# Altium PCB MTB.TEMPLATE.PcbDoc (part 2 of 3)
Units mm, origin at the board's own origin, x right, y up, seen from the top; angles counter-clockwise.
Board outline 100 x 100 mm, 2 copper layers (Top Layer, Bottom Layer), stack 1.576 mm thick; 279 components, 187 nets, 803 pads, 2 vias.
Unrouted connection lines stored in the file: 418.
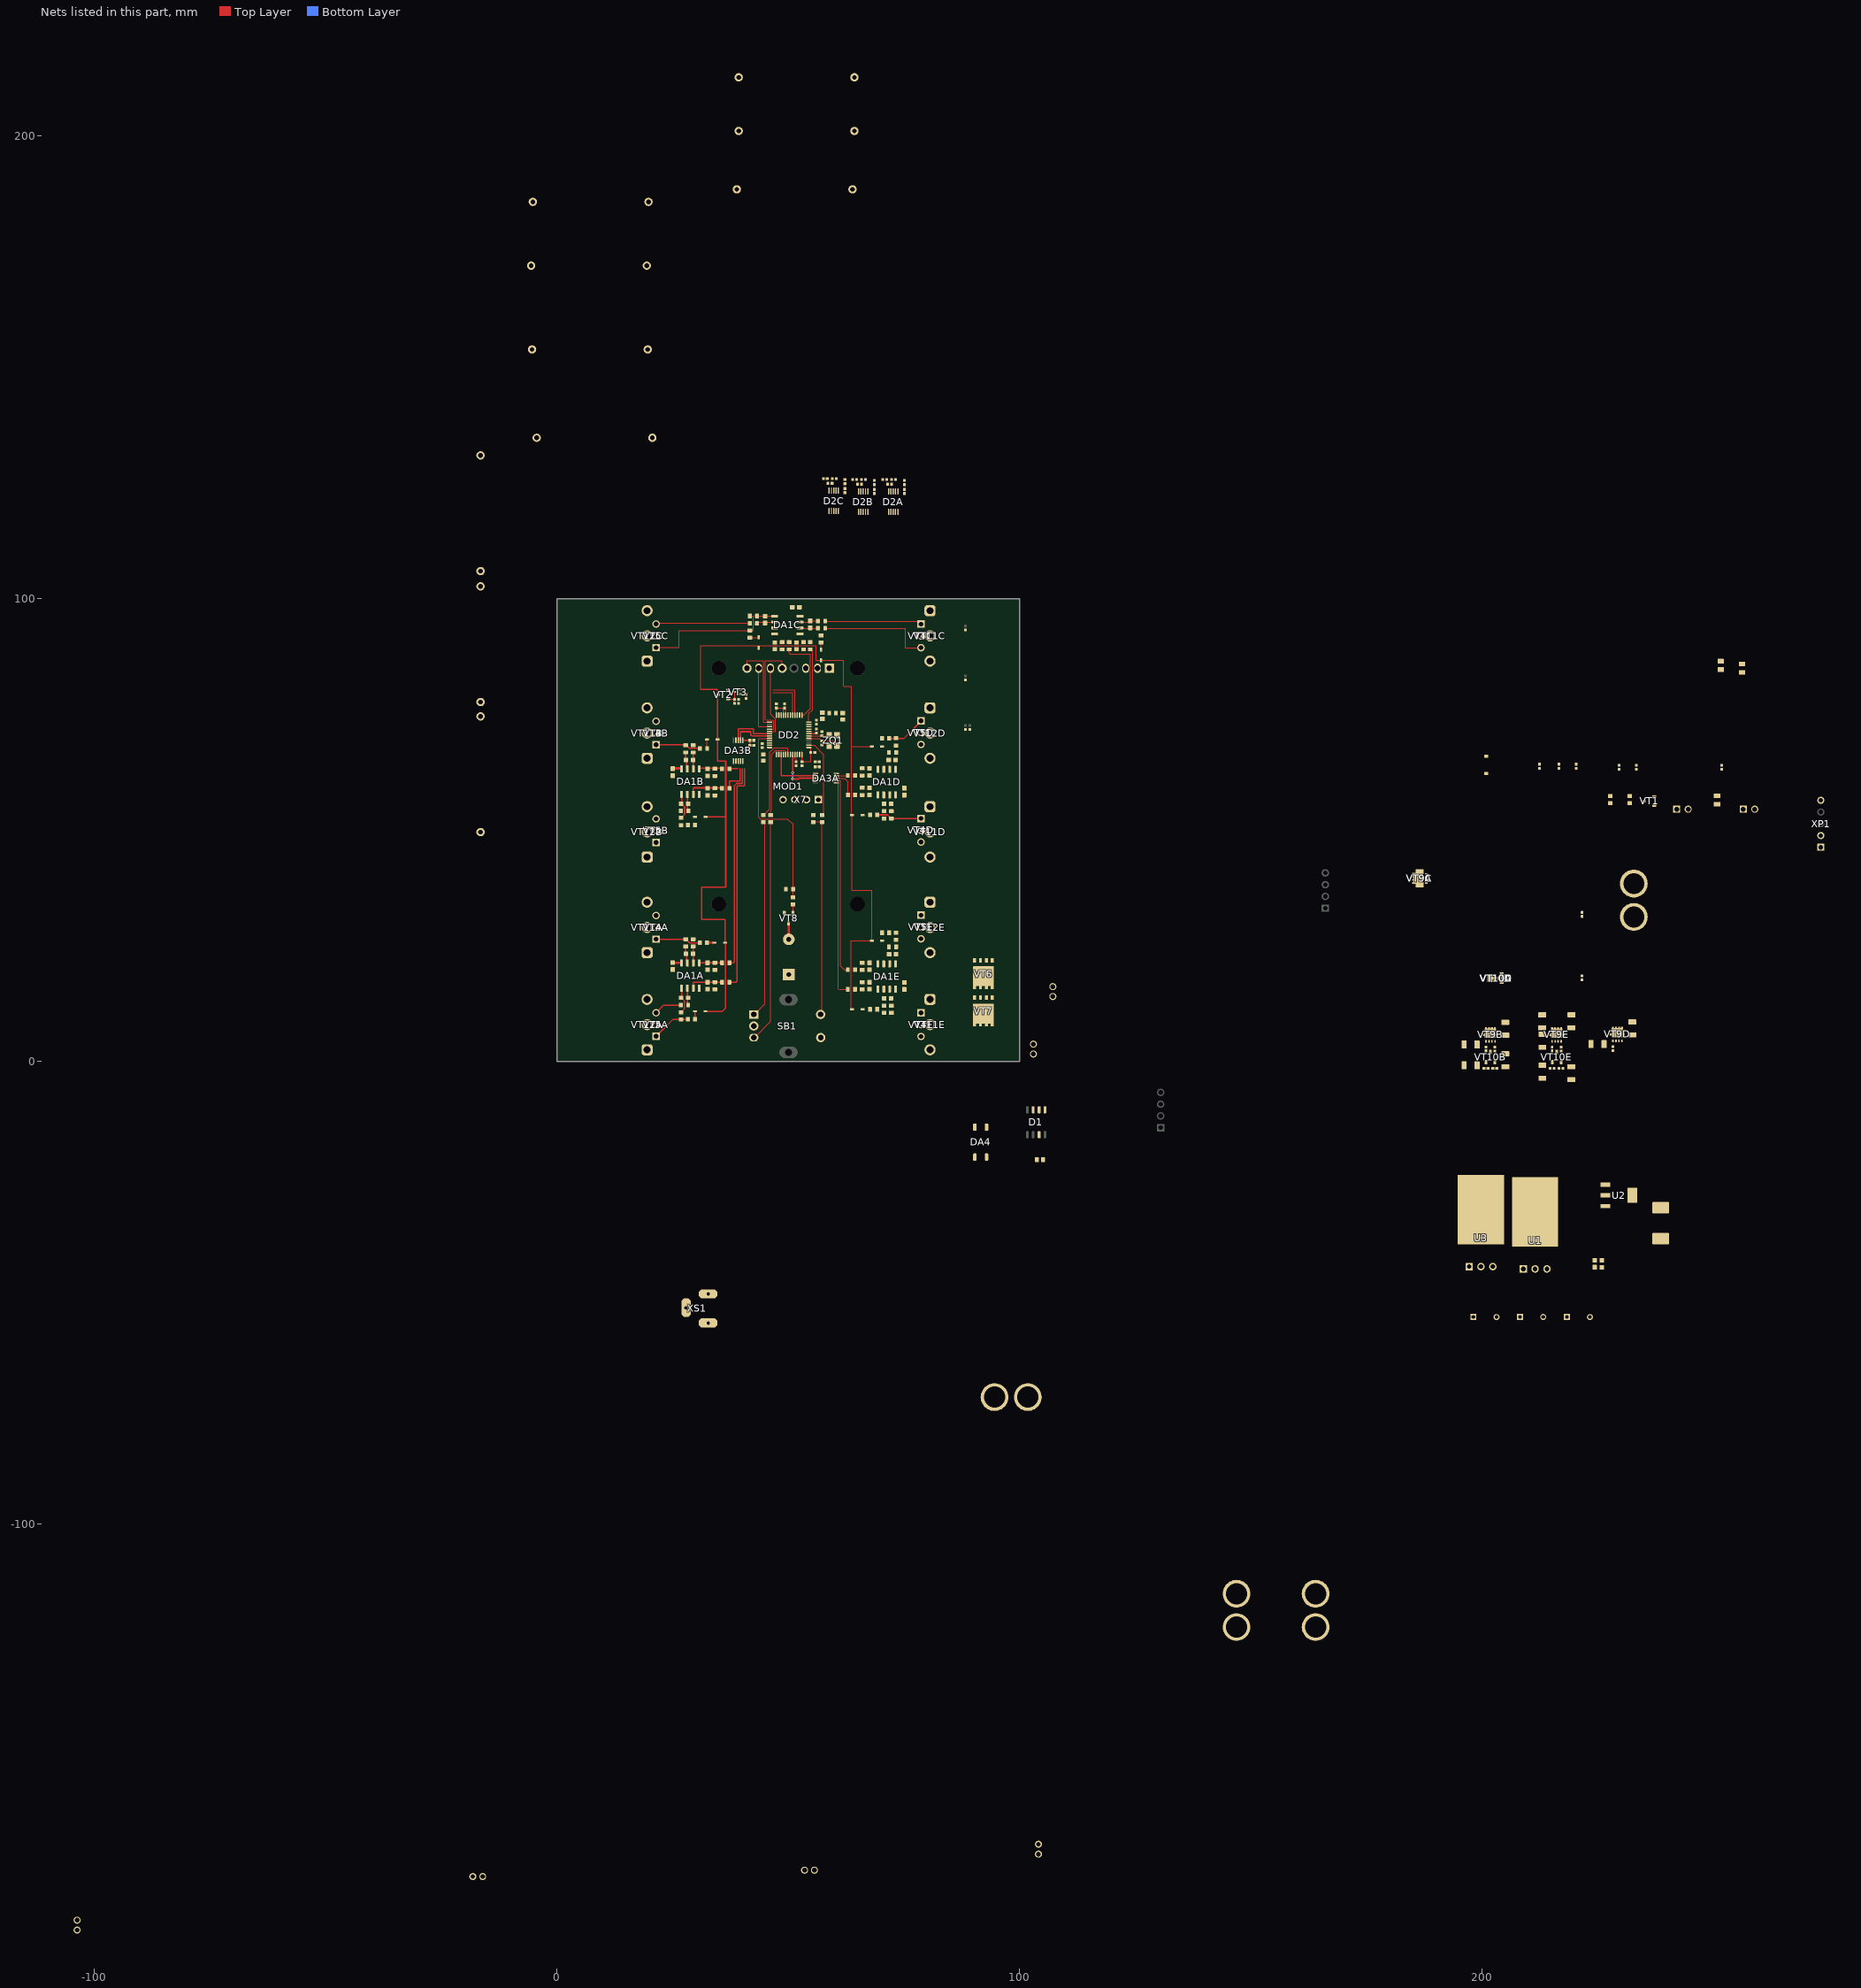
[diagram p2: the nets of this part, all layers, seen from the top]

## Part data
10kB 10kC 10kD 10kE: library part "10 k  R0402", "RES SMD 10 k OHM  ±1% 1/16W 0402", Operation Temperature="-55℃ to 155℃", Package/Case=0402, Power Rating=0.063W, Temperature Coefficient="±100 ppm/°C", Tolerance=±1%, Library Path 1=Resistor.SchLib, Name Component=Resistror, Part Number="10 k  R0402"
C1: library part "0.1µF  50V C0603", "CAP CER 0.1UF 50V X7R 0603", Manufacturer="Samsung Electro-Mechanics", Manufacturer P/N=CL10B104KB8WPNC, Operation Temperature="-55°C ~ 125°C", Package/Case=C0603, Power (V/A)=50V, Supplier Part Number 1=1276-6854-2-ND, Temperature Coefficient=X7R, Tolerance=±10%, ComponentLink1Description=Datasheet, ComponentLink1URL=https://www.samsungsem.com/resources/file/global/support/product_catalog/MLCC.pdf, Library Path 1=Capacitors.SchLib, Name Component="Capacitor Ceramic", Notes="06035C104K4T4A, 06035C104K4T2A", Part Number="0.1µF  50V C0603", Supplier 1=Digi-key
C2A C2B C2C C2D C2E C3A C3B C3C C3D C3E C4A C4B C4C C4D C4E C16A C16B C16C C16D C16E C17A C17B C17C C17D C17E C25 C26: library part "0.1uF  50V C0603", "CAP CER 0.1UF 50V X7R 0603", Manufacturer="Samsung Electro-Mechanics", Manufacturer P/N=CL10B104KB8WPNC, Operation Temperature="-55°C ~ 125°C", Package/Case=C0603, Power (V/A)=50V, Supplier Part Number 1=1276-6854-2-ND, Temperature Coefficient=X7R, Tolerance=±10%, ComponentLink1Description=Datasheet, ComponentLink1URL=https://www.samsungsem.com/resources/file/global/support/product_catalog/MLCC.pdf, Library Path 1=Capacitors.SchLib, Name Component="Capacitor Ceramic", Notes="06035C104K4T4A, 06035C104K4T2A", Part Number="0.1uF  50V C0603", Supplier 1=Digi-key
C5 C24 C32: library part "1000uF  16V 10x16(EHR)", "1000uF 20% 16V EHR 10x16mm", Manufacturer=Hitano, Manufacturer P/N=EHR102M16BA, Operation Temperature="−40°C to +105°C", Package/Case=10x16(EHR), Power (V/A)=16V, Tolerance=±20%, ComponentLink1Description=Datasheet, ComponentLink1URL=https://www.rcscomponents.kiev.ua/datasheets/EHR_081225.pdf, Library Path 1=Capacitors.SchLib, Name Component="Electrolytic capacitor", Part Number="1000uF  16V 10x16(EHR)", Supplier 1=RCS
C6 C9: library part "10µF  6.3V C0603", "CAP CER 10UF 6.3V X5R 0603", Manufacturer="Murata Electronics North America", Manufacturer P/N=GRM185R60J106ME15D, Operation Temperature="-55°C ~ 105°C", Package/Case=C0603, Power (V/A)=6.3V, Supplier Part Number 1=490-10467-2-ND, Temperature Coefficient=X5R, Tolerance=±20%, ComponentLink1Description=Datasheet, ComponentLink1URL=https://www.murata.com/~/media/webrenewal/support/library/catalog/products/capacitor/mlcc/c02e.ashx?la=en-us, Library Path 1=Capacitors.SchLib, Name Component="Capacitor Ceramic", Notes=GRM185R60J106ME15J, Part Number="10µF  6.3V C0603", Supplier 1=Digi-key
C7 C8 C10 C11 C12 C13 C15 C18: library part GRM155R71E104KE14J, "100nF 25V X7R ±10% 0402 Ceramic Capacitor RoHS", Dielectric Type=X7R, Manufacturer="Murata Electronics", Package=0402, Temperature range="-55°C ~ 125°C", Tolerance=±10%, Voltage=25V, Ajax_1C_ID=24481, Ajax_1C_PN="100nF 25V X7R 10% 0402 GRM155R71E104KE14J Ceramic Capacitor SMD RoHS", Ajax_1С_Status="Mass Production", Component Status=Released, Component Type=SMD, ComponentLink1Description=Datasheet, ComponentLink1URL=https://eu.mouser.com/datasheet/2/281/1/GRM155R71E104KE14_01A-1984358.pdf, GUID_1C=92ffc16c-33b6-11eb-ab6e-0050569f2651, Part Number=GRM155R71E104KE14J, Part Type="Ceramic / X7R / 0402", Price=0.00630066, Replacement=NONE, Standard Lead Time="24 Weeks"
C14: library part "1µF  25V C0603", "CAP CER 1UF 25V X5R 0603", Manufacturer="AVX Corporation", Manufacturer P/N=06033D105KAT2A, Operation Temperature="-55°C ~ 105°C", Package/Case=C0603, Power (V/A)=25V, Supplier Part Number 1=478-5142-2-ND, Temperature Coefficient=X5R, Tolerance=±10%, ComponentLink1Description=Datasheet, ComponentLink1URL=http://catalogs.avx.com/SurfaceMount.pdf, Library Path 1=Capacitors.SchLib, Name Component="Capacitor Ceramic", Part Number="1µF  25V C0603", Supplier 1=Digi-key
C20A C20B: library part CL05A105KP5NNNC, "1uF 10V Х5R ±10% 0402 Ceramic Capacitor RoHS", Dielectric Type=X5R, Manufacturer="Samsung Electro-Mechanics", Package=0402, Supplier Part Number 1=1276-1076-2-ND, Temperature range="-55°C ~ 85°C", Tolerance=±10%, Voltage=10V, Ajax_1C_ID=23659, Ajax_1C_PN="1uF 10V Х5R 10% 0402 Samsung CL05A105KP5NNNC Ceramic Capacitor SMD RoHS", Ajax_1С_Status="Mass Production", Component Status=Released, Component Type=SMD, ComponentLink1Description=Datasheet, ComponentLink1URL=https://media.digikey.com/pdf/Data%20Sheets/Samsung%20PDFs/CL_Series_MLCC_ds.pdf, GUID_1C=556ec478-1f42-11eb-ab6d-0050569f2651, Part Number=CL05A105KP5NNNC, Part Type="Ceramic / X5R / 0402", Price=0.00141, Replacement=NONE, Standard Lead Time="18 Weeks", Supplier 1=Digi-Key
C21A C21B: library part CL05A104KA5NNNC, "100nF 25V X5R ±10% 0402 Ceramic Capacitor RoHS", Dielectric Type=X5R, Manufacturer="Samsung Electro-Mechanics", Package=0402, Supplier Part Number 1=187-CL05A104KA5NNNC, Temperature range="-55°C ~ 85°C", Tolerance=±10%, Voltage=25V, Ajax_1C_ID=27170, Ajax_1C_PN="100nF 25V X5R 10% 0402 CL05A104KA5NNNC Ceramic Capacitor SMD RoHS", Ajax_1С_Status="Mass Production", Component Status=Released, Component Type=SMD, ComponentLink1Description=Datasheet, ComponentLink1URL=https://eu.mouser.com/datasheet/2/585/MLCC-1837944.pdf, GUID_1C=6c9121f0-7733-11eb-ab70-0050569f2651, Part Number=CL05A104KA5NNNC, Part Type="Ceramic / X5R / 0402", Price=0.0013, Replacement=NONE, Standard Lead Time="38 Weeks", Supplier 1=Mouser
C22 C28: library part CAP0805, "0805 CAP 100nF 50V"
C27: library part "220uF  10V CASE-D", "CAP TANT 220UF 20% 10V 2917", Manufacturer=KEMET, Manufacturer P/N=T491D227M010AT, Operation Temperature="-55°C ~ 125°C", Package/Case=CASE-D, Power (V/A)=10V, Supplier Part Number 1=399-9744-2-ND, Temperature Coefficient=-, Tolerance=±20%, ComponentLink1Description=Datasheet, ComponentLink1URL=https://content.kemet.com/datasheets/KEM_T2005_T491.pdf, Library Path 1=Capacitors.SchLib, Name Component=CapacitorTantalum, Part Number="220uF  10V CASE-D", Supplier 1=Digi-key
C29 C30: library part CL05C120JB5NNNC, "12pF 50V C0G ±5% 0402 Ceramic Capacitor RoHS", Dielectric Type=C0G/NP0, Manufacturer="Samsung Electro-Mechanics", Package=0402, Supplier Part Number 1=1276-1178-2-ND, Temperature range="-55°C ~ 125°C", Tolerance=±5%, Voltage=50V, Ajax_1C_ID=15982, Ajax_1C_PN="12pF 50V COG 5% 0402 CL05C120JB5NNNC Ceramic Capacitor SMD RoHS", Ajax_1С_Status="Mass Production", Component Status=Released, Component Type=SMD, ComponentLink1Description=Datasheet, ComponentLink1URL=https://media.digikey.com/pdf/Data%20Sheets/Samsung%20PDFs/CL_Series_MLCC_ds.pdf, GUID_1C=5e79e13c-76f0-11e9-ab56-0050569f2651, Part Number=CL05C120JB5NNNC, Part Type="Ceramic / C0G(NP0) / 0402", Price=0.0022, Replacement=NONE, Standard Lead Time="28 Weeks", Supplier 1=Digi-Key
C31A C31B C31C: library part "10uF  6.3V C0402", "CAP CER 10UF 6.3V X6S 0402", Manufacturer="Murata Electronics North America", Manufacturer P/N=GRM155C80J106ME11D, Operation Temperature="-55°C ~ 105°C", Package/Case=C0402, Power (V/A)=6.3V, Supplier Part Number 1=490-13233-2-ND, Temperature Coefficient=X6S, Tolerance=±20%, ComponentLink1Description=Datasheet, ComponentLink1URL=https://www.murata.com/~/media/webrenewal/support/library/catalog/products/capacitor/mlcc/c02e.ashx?la=en-us, Library Path 1=Capacitors.SchLib, Name Component="Capacitor Ceramic", Part Number="10uF  6.3V C0402", Supplier 1=Digi-key
C33A C33B C33C: library part "0.1uF  25V C0403", "CAP CER 0.1UF 25V X7R 0603", Manufacturer="Samsung Electro-Mechanics", Operation Temperature="-55°C ~ 125°C", Package/Case=C0403, Power (V/A)=25V, Supplier Part Number 1=1276-6854-2-ND, Temperature Coefficient=X7R, Tolerance=±10%, ComponentLink1Description=Datasheet, Library Path 1=Capacitors.SchLib, Name Component="Capacitor Ceramic", Part Number="0.1uF  25V C0403"
C34A C34B C34C: library part "10nF  50V C0402", "CAP CER 10NF 50V NP0 0603", Manufacturer="AVX Corporation", Operation Temperature="-55°C ~ 105°C", Package/Case=C0402, Power (V/A)=50V, Temperature Coefficient="C0G, NP0", Tolerance=±0.25pF, ComponentLink1Description=Datasheet, Library Path 1=Capacitors.SchLib, Name Component="Capacitor Ceramic", Part Number="10nF  50V C0402", Supplier 1=Digi-key
D1: "3.3V Half Duplex CAN Transceivers with CAN FD, 5 Mbps, SOIC-8", Manufacturer="Texas Instruments", Package=SOIC-8, Supplier Part Number 1=595-TCAN332GD, Temperature range="-40°C ~ 125°C", Ajax_1C_PN=NONE, Ajax_1С_Status="RND Only", Component Status=Released, Component Type=SMD, ComponentLink1Description=Datasheet, ComponentLink1URL=https://www.ti.com/lit/ds/symlink/tcan334g.pdf, Lifecycle="Packaging Not for Production", Part Number=TCAN332GD, Part Type="Transceivers / CAN", Price=NONE, Replacement=NONE, Standard Lead Time="56 Weeks", Supplier 1=Mouser
D2A D2B D2C: "85V, 20Bit, Ultra-Precise Power/Energy/Charge Monitor With I2C, 2.7V to 5.5V Supply, VSSOP-10", Manufacturer="Texas Instruments", Package=VSSOP-10, Supplier Part Number 1=296-INA228AIDGSRTR-ND, Temperature range="-40°C ~ 125°C", Ajax_1C_ID=73549, Ajax_1C_PN="INA228AIDGSR IC Power Supply Controller VSSOP-10 TI", Ajax_1С_Status="Mass Production", Component Status=Released, Component Type=SMD, ComponentLink1Description=Datasheet, ComponentLink1URL=https://www.ti.com/lit/ds/symlink/ina228.pdf, GUID_1C=d5df315a-0f3b-11ee-a36c-005056994834, Part Number=INA228AIDGSR, Part Type="Amplifier / Current Sense", Price=3.28, Replacement=NONE, Standard Lead Time="57 Weeks", Supplier 1=Digi-Key
DA1A DA1B DA1C DA1D DA1E: "IC OPAMP GP 2 CIRCUIT 8SOIC  1.1 MHz   3V...30V", Manufacturer="Texas Instruments", Manufacturer P/N=LM358ADR, Operation Temperature="0°C ~ 70°C", Package/Case=8-SOIC, Power (V/A)="3V ~ 30V", ComponentLink1Description=Datasheet, ComponentLink1URL=https://www.st.com/content/ccc/resource/technical/document/datasheet/61/46/87/01/98/ed/44/c5/CD00000464.pdf/files/CD00000464.pdf/jcr:content/translations/en.CD00000464.pdf, Library Path 1="Integrated Circuit.SchLib", Name Component=Comparators, Part Number=LM358ADT, Supplier 1=Kosmodrom, Supplier Part Number 1=LM358ADT
DA3A DA3B: "12-Bit, Quad Digital-to-Analog Converter with EEPROM Memory, MSOP-10", Manufacturer="Microchip Technology", Package=MSOP-10, Supplier Part Number 1=MCP4728A0T-E/UNTR-ND, Temperature range="-40°C ~ 125°C", Ajax_1C_ID=39734, Ajax_1C_PN="MCP4728A0T-E/UN MSOP-10 мікросхема", Ajax_1С_Status="Mass Production", Component Status=Released, Component Type=SMD, ComponentLink1Description=Datasheet, ComponentLink1URL=https://ww1.microchip.com/downloads/en/DeviceDoc/22187E.pdf, GUID_1C=ce0ad344-8e40-11ec-a90d-00505699469b, Part Number=MCP4728A0T-E/UN, Part Type=DAC, Price=2.09, Replacement=NONE, Standard Lead Time="52 Weeks", Supplier 1=Digi-Key
DA4: "Photovoltaic MOSFET Driver with Integrated Fast Turn-Off, 3750 VRMS", Color=NONE, Manufacturer="Vishay Semiconductors", Package=SOP-4, Supplier Part Number 1=VOM1271TTR-ND, Temperature range="-40°C ~ 100°C", Ajax_1C_ID=15545, Ajax_1C_PN="VOM1271T оптрон", Ajax_1С_Status="Mass Production", Component Status=Released, Component Type=SMD, ComponentLink1Description=Datasheet, ComponentLink1URL=https://www.vishay.com/docs/83469/vom1271.pdf, GUID_1C=d92e23f6-5530-11e9-ab4e-0050569f2651, Part Number=VOM1271T, Part Type=Optocoupler, Price=1.2896, Replacement=NONE, Supplier 1=Digi-Key, Wavelength=NONE
DD2: "ARM® Cortex®-M4F STM32G4 Microcontroller IC 32-Bit Single-Core 170MHz 128KB (128K x 8) FLASH 48-LQFP (7x7)", Manufacturer=STMicroelectronics, Operation Temperature="-40°C ~ 85°C (TA)", Package="UFQFPN-48 STMicroelectronics", Package/Case=48-LQFP, Power (V/A)="1.71V ~ 3.6V", Supplier Part Number 1=497-19475-ND, Check_prices=https://www.snapeda.com/parts/STM32G431CBU6/STMicroelectronics/view-part/?ref=eda, ComponentLink1Description=Datasheet, ComponentLink1URL=https://www.st.com/resource/en/datasheet/stm32g431cb.pdf, Library Path 1="Integrated Circuit.SchLib", Manufacturer P/N=STM32G431CBT6, MF=STMicroelectronics, MP=STM32G431CBU6, Name Component=Microcontrollers, Part Number=STM32G431CBT6, SnapEDA_Link=https://www.snapeda.com/parts/STM32G431CBU6/STMicroelectronics/view-part/?ref=snap, Supplier 1=Digi-key
HA1: "AUDIO MAGNETIC 1.2-2.5 V", Operation Temperature="-20 °C to +70 °C", Package/Case=12x9.5, Power (V/A)="1,2...2,5 V", AbridgedComponentDescription=TMB12A01, ComponentDescription="Buzzer  TMB12A01  (12x9.5)", ComponentLink1Description=Datasheet, ComponentLink1URL=http://www.kosmodrom.com.ua/el.php?name=TMB12A01, Library Path 1=Others.SchLib, Name Component=Buzzer, Part Number=TMB12A01, Supplier 1=Kosmodrom, Supplier Part Number 1=TMB12A01
L2: "FERRITE BEAD 1 KOHM 0603 1LN", Manufacturer="Murata Electronics North America", Manufacturer P/N=BLM18AG102SZ1D, Package/Case="0603 (1608 Metric)", Power (V/A)=400mA, Supplier Part Number 1=490-16503-2-ND, Tolerance=±25%, ComponentLink1Description=Datasheet, ComponentLink1URL=https://media.digikey.com/pdf/Data%20Sheets/Murata%20PDFs/BLM18yyyyyyN1x.pdf, Library Path 1=Inductance.SchLib, Name Component="Ferrite Beads", Part Number=BLM18AG102, Supplier 1=Digi-key
MOD1: "Display Board TFT 1.8\" SPI Driver ST7735S with SD", Operation Temperature="-40°C ~ 85°C", Package/Case=56x35mm, Power (V/A)="3.3 V", ComponentLink1Description=Datasheet, Library Path 1=Module.SchLib, Name Component=Display, Part Number="TFT 1.8\" SPI Board"
R1: library part RC0805FR-0730KL, "30 kOhms ±1%, 1/8W 0805 Thick Film Resistor", Manufacturer=Yageo, Package=0805, Power Rating=0.125W, Supplier Part Number 1=311-30.0KCRTR-ND, Temperature range="-55°C ~ 155°C", Temperature Stability=±100ppm/°C, Tolerance=±1%, Voltage=150V, Ajax_1C_ID=9642, Ajax_1C_PN="30k 1% 0805 Resistors SMD RoHS", Ajax_1С_Status="Mass Production", Component Status=Released, Component Type=SMD, ComponentLink1Description=Datasheet, ComponentLink1URL=https://eu.mouser.com/datasheet/2/447/PYu_RC_Group_51_RoHS_L_10-1664068.pdf, GUID_1C=71e2aa09-07e0-11e7-82d0-d8cb8a9acc66, Part Number=RC0805FR-0730KL, Part Type="Thick Film", Price=0.0014, Replacement=NONE, Supplier 1=Digi-Key
R2: library part RC0805FR-07100KL, "100 kOhms ±1%, 1/8W 0805 Thick Film Resistor", Manufacturer=Yageo, Package=0805, Power Rating=0.125W, Supplier Part Number 1=311-100KCRTR-ND, Temperature range="-55°C ~ 155°C", Temperature Stability=±100ppm/°C, Tolerance=±1%, Voltage=150V, Ajax_1C_ID=7487, Ajax_1C_PN="100k 1% 0805 Resistors SMD RoHS", Ajax_1С_Status="Mass Production", Component Status=Released, Component Type=SMD, ComponentLink1Description=Datasheet, ComponentLink1URL=https://eu.mouser.com/datasheet/2/447/PYu_RC_Group_51_RoHS_L_10-1664068.pdf, GUID_1C=0fb4516d-b2dc-11e5-8119-d8cb8a9acc66, Part Number=RC0805FR-07100KL, Part Type="Thick Film", Price=0.0014, Replacement=NONE, Supplier 1=Digi-Key
R3 R10 R11 R28: library part RC0402FR-07220RL, "220 Ohms ±1% 1/16W 0402 Thick Film Resistor", Manufacturer=Yageo, Package=0402, Power Rating=0.062W, Temperature range="-55°C ~ 155°C", Temperature Stability=±100ppm/°C, Tolerance=±1%, Voltage=50V, Ajax_1C_ID=6466, Ajax_1C_PN="220R 1% 0402 Resistors SMD RoHS", Ajax_1С_Status="Mass Production", Component Status=Released, Component Type=SMD, ComponentLink1Description=Datasheet, ComponentLink1URL=https://eu.mouser.com/datasheet/2/447/PYu_RC_Group_51_RoHS_L_10-1664068.pdf, GUID_1C=c8eea36b-fd66-11e4-ad28-a45d36c4a9e5, Part Number=RC0402FR-07220RL, Part Type="Thick Film", Replacement=NONE
  R3 R10 R11: Price=0.00065
  R28: Price=0.0007
R4: library part "10 k  R0603", "RES SMD 10 k OHM  ±1% 1/10W 0603", Operation Temperature="-55℃ to 155℃", Power Rating=0.1W, Temperature Coefficient="±100 ppm/°C", Library Path 1=Resistor.SchLib, Name Component=Resistror, Part Number="10 k  R0603"
R5: library part RC0402FR-071KL, "1 kOhms ±1% 1/16W 0402 Thick Film Resistor", Manufacturer=Yageo, Package=0402, Power Rating=0.062W, Supplier Part Number 1=311-1.00KLRTR-ND, Temperature range="-55°C ~ 155°C", Temperature Stability=±100ppm/°C, Tolerance=±1%, Voltage=50V, Ajax_1C_ID=4845, Ajax_1C_PN="1k 1% 0402 Resistors SMD RoHS", Ajax_1С_Status="Mass Production", Component Status=Released, Component Type=SMD, ComponentLink1Description=Datasheet, ComponentLink1URL=https://eu.mouser.com/datasheet/2/447/PYu_RC_Group_51_RoHS_L_11-1984063.pdf, GUID_1C=bf05aaa5-08f0-11e4-b679-a45d36c4a9e5, Part Number=RC0402FR-071KL, Part Type="Thick Film", Price=0.0007, Replacement=NONE, Supplier 1=Digi-Key
R6 R32: library part "100  R0603", "RES SMD 100 OHM  ±1% 1/10W 0603", Operation Temperature="-55℃ to 155℃", Package/Case=0603, Power Rating=0.1W, Temperature Coefficient="±100 ppm/°C", Tolerance=±1%, Library Path 1=Resistor.SchLib, Name Component=Resistror, Part Number="100  R0603"
R7 R33: library part "100 k  R0603", "RES SMD 100 k OHM  ±1% 1/10W 0603", Operation Temperature="-55℃ to 155℃", Package/Case=0603, Power Rating=0.1W, Temperature Coefficient="±100 ppm/°C", Tolerance=±1%, Library Path 1=Resistor.SchLib, Name Component=Resistror, Part Number="100 k  R0603"
R9 R43 R45: library part "100  R0603", "RES SMD 100 OHM  ±1% 1/10W 0603", Operation Temperature="-55℃ to 155℃", Temperature Coefficient="±100 ppm/°C", Tolerance=±1%, Library Path 1=Resistor.SchLib, Name Component=Resistror, Part Number="100  R0603"
R12A R12B R12C R12D R12E R13A R13B R13C R13D R13E R14A R14B R14C R14D R14E R15A R15B R15C R15D R15E R16A R16B R16C R16D R16E R19A R19B R19C R19D R19E R20A R20B R20C R20D R20E R21A R21B R21C R21D R21E R22A R22B R22C R22D R22E R24A R24B R24C R24D R24E: library part "1 k  R0603", "RES SMD 1 k OHM  ±1% 1/10W 0603", Operation Temperature="-55℃ to 155℃", Package/Case=0603, Power Rating=0.1W, Temperature Coefficient="±100 ppm/°C", Tolerance=±1%, Library Path 1=Resistor.SchLib, Name Component=Resistror, Part Number="1 k  R0603"
R17A R17B R17C R17D R17E R26A R26B R26C R26D R26E: library part "47  RES_5W", "Resistror 47 OHM  ±10% AXIAL  9.00mm x 22.00mm", Operation Temperature="-55℃ to 155℃", Power Rating=5W, Temperature Coefficient="±100 ppm/°C", Tolerance=±10%, Library Path 1=Resistor.SchLib, Name Component=Resistror, Part Number="47  RES_5W"
R29 R46A R46B R46C R46D R46E: library part RC0402DR-071KL, "1 kOhms ±0.5% 1/16W 0402 Thick Film Resistor", Manufacturer=Yageo, Package=0402, Power Rating=0.062W, Supplier Part Number 1=13-RC0402DR-071KLTR-ND, Temperature range="-55°C ~ 155°C", Temperature Stability=±100ppm/°C, Tolerance=±0.5%, Voltage=50V, Ajax_1C_ID=54619, Ajax_1C_PN="1k 0.5% 0402 RC0402DR-071KL Resistors SMD RoHS", Ajax_1С_Status="Mass Production", Component Status=Released, Component Type=SMD, ComponentLink1Description=Datasheet, ComponentLink1URL=https://www.yageo.com/upload/media/product/productsearch/datasheet/rchip/PYu-RC_Group_51_RoHS_L_12.pdf, GUID_1C=a470e21a-6423-11ed-a366-005056994834, Part Number=RC0402DR-071KL, Part Type="Thick Film", Price=0.015, Replacement=NONE, Supplier 1=Digi-Key
R30: library part RC0402JR-0710KL, "10 kOhms ±5% 1/16W 0402 Thick Film Resistor", Manufacturer=Yageo, Package=0402, Power Rating=0.062W, Supplier Part Number 1=311-10KJRTR-ND, Temperature range="-55°C ~ 155°C", Temperature Stability=±100ppm/°C, Tolerance=±5%, Voltage=50V, Ajax_1C_ID=3447, Ajax_1C_PN="10k 5% 0402 Resistors SMD RoHS", Ajax_1С_Status="Mass Production", Component Status=Released, Component Type=SMD, ComponentLink1Description=Datasheet, ComponentLink1URL=https://eu.mouser.com/datasheet/2/447/PYu_RC_Group_51_RoHS_L_10-1664068.pdf, GUID_1C=0d073320-42e0-11e3-bb71-6c626deda1bb, Part Number=RC0402JR-0710KL, Part Type="Thick Film", Price=0.0005, Replacement=NONE, Supplier 1=Digi-Key
R31: library part "22  R0603", "RES SMD 22 OHM  ±1% 1/10W 0603", Operation Temperature="-55℃ to 155℃", Package/Case=0603, Temperature Coefficient="±100 ppm/°C", Tolerance=±1%, Library Path 1=Resistor.SchLib, Name Component=Resistror, Part Number="22  R0603"
R37A R37B R37C R38A R38B R38C: library part "10  R0402", "RES SMD 10 OHM  ±1% 1/16W 0402", Operation Temperature="-55℃ to 155℃", Package/Case=0402, Power Rating=0.063W, Temperature Coefficient="±200 ppm/°C", Tolerance=±1%, Library Path 1=Resistor.SchLib, Name Component=Resistror, Part Number="10  R0402"
R39A R39B R39C R39D R39E R40A R40B R40C R40D R40E R41A R41B R41C R41D R41E R47A R47B R47C R47D R47E R49A R49B R49C R49D R49E: library part RCS12060000Z0EA, "0 Ohms Jumper, 1/2W 1206 Thick Film Resistor", Manufacturer=Vishay, Package=1206, Power Rating=0.5W, Supplier Part Number 1=71-RCS12060000Z0EA, Temperature range="-55°C ~ 155°C", Temperature Stability=NONE, Tolerance=0.5%, Ajax_1C_ID=28766, Ajax_1C_PN="0R Jumper 1206 1/2W Resistors SMD RoHS", Ajax_1С_Status="Mass Production", Component Status=Released, Component Type=SMD, ComponentLink1Description=Datasheet, ComponentLink1URL=https://eu.mouser.com/datasheet/2/427/rcse3-1761771.pdf, GUID_1C=39e965f6-9d2d-11eb-ab70-0050569f2651, Part Number=RCS12060000Z0EA, Part Type="Thick Film", Price=0.023, Replacement=NONE, Supplier 1=Mouser, Voltage=NONE
R42A R42B R42C R42D R42E R48A R48B R48C R48D R48E: library part WF04U1003BTL, "100 kOhms ±0.1%, 1/16W 0402 Thin Film Resistor", Manufacturer="Walsin Technology Corporation", Package=0402, Power Rating=0.062W, Supplier Part Number 1=1292-WF04U1003BTLTR-ND, Temperature range="-55°C ~ 155°C", Temperature Stability=±25ppm/°C, Tolerance=±0.1%, Voltage=50V, Ajax_1C_ID=137562, Ajax_1C_PN="100k 0.1% 0402 62.5mW WF04U1003BTL Walsin Thin Film Resistors SMD RoHS", Ajax_1С_Status=Substitution, Component Status=Review, Component Type=SMD, ComponentLink1Description=Datasheet, ComponentLink1URL=https://www.passivecomponent.com/wp-content/uploads/thin_film/ASC_WFxxT&U.pdf, GUID_1C=d33922d2-2bd8-11f0-b984-00505699fadc, Part Number=WF04U1003BTL, Part Type="Thin Film", Price=0.109, Replacement=NONE, Supplier 1=Digi-Key
R44A R44B R44C R44D R44E: library part RC0402JR-07100RL, "100 Ohms ±5% 1/16W 0402 Thick Film Resistor", Manufacturer=Yageo, Package=0402, Power Rating=0.062W, Supplier Part Number 1=311-100JRTR-ND, Temperature range="-55°C ~ 155°C", Temperature Stability=±100ppm/°C, Tolerance=±5%, Voltage=50V, Ajax_1C_ID=4879, Ajax_1C_PN="100R 5% 0402 Resistors SMD RoHS", Ajax_1С_Status="Mass Production", Component Status=Released, Component Type=SMD, ComponentLink1Description=Datasheet, ComponentLink1URL=https://eu.mouser.com/datasheet/2/447/PYu_RC_Group_51_RoHS_L_10-1664068.pdf, GUID_1C=955d0a6e-1239-11e4-b679-a45d36c4a9e5, Part Number=RC0402JR-07100RL, Part Type="Thick Film", Price=0.00250459, Replacement=NONE, Supplier 1=Digi-Key
RK1A RK1B RK1C RK1D RK1E RK1F: "10 kOhm ±1% Thermistors, Radial Leaded, 3435 K B Parameter, 28.5x3.6mm, Max 0.6mm Thickness", Manufacturer="Dongguan Tianrui Electronics Co", Temperature range="-40°C ~ 105°C", Ajax_1C_ID=44964, Ajax_1C_PN="MF55-103F-3435 thermistor probe 10k ±1% 3.6*28.5mm Tianrui", Ajax_1С_Status="Mass Production", Component Status=Released, Component Type=PTH, ComponentLink1Description=Datasheet, ComponentLink1URL=\\altiumdb.ajax.local\files\Datasheet\Miscellaneous\MF55-103F-3435.pdf, GUID_1C=bce193fe-f38d-11ec-a361-005056994834, Part Number=MF55-103F-3435, Part Type=Thermistor, Price=0.13, Replacement=NONE
SB1: "Alps Alpine", Manufacturer P/N=EC11E15244B2, Operation Temperature="-20°C ~ 70°C", Power (V/A)="5V 10mA", AbridgedComponentDescription=EC11-PH-15, ComponentLink1Description=Datasheet, ComponentLink1URL=https://tech.alpsalpine.com/e/products/detail/EC11E15244B2/, Library Path 1=Switches.SchLib, Name Component=Encoder, Part Number=EC11-PH-15, Supplier 1=Digi-key
U1: "IC REG LINEAR 12V 500MA DPAK", Manufacturer=STMicroelectronics, Operation Temperature="0°C ~ 150°C", Package/Case=D-PAK, Power (V/A)="14 ... 35V", ComponentDescription="Linear Voltage Regulator L7812CV   (D-PAK)", ComponentLink1Description=Datasheet, ComponentLink1URL=https://mm.digikey.com/Volume0/opasdata/d220001/medias/docus/2578/L78MxxAB%2CAC%20.pdf, Library Path 1="Power converters.SchLib", Name Component="Linear Voltage Regulator", Part Number=L7812CV, Supplier 1=Digi-key
U2: library part LD1117S33CTR, "IC REG LINEAR 3.3V 800MA SOT223", Manufacturer=STMicroelectronics, Operation Temperature="-40°C ~ 125°C", Package=SOT-223, Power (V/A)="0.8 A 3.3 В", Supplier Part Number 1=497-1241-2-ND, Temperature range="0°C ~ 125°C", Component Type=SMD, ComponentDescription="Linear Regulators  LD1117S33CTR  (SOT-223)", ComponentLink1Description=Datasheet, ComponentLink1URL=https://www.st.com/content/ccc/resource/technical/document/datasheet/99/3b/7d/91/91/51/4b/be/CD00000544.pdf/files/CD00000544.pdf/jcr:content/translations/en.CD00000544.pdf, Library Path 1="Power converters.SchLib", Manufacturer P/N=LD1117S33CTR, Name Component="Linear Regulators", Package/Case=SOT-223, Part Number=LD1117S33CTR, Part Type="Power / Linear Regulator", Price=0,11994941, Supplier 1=Digi-key
U3: "IC REG LINEAR 5V 1.5A DPAK", Manufacturer=STMicroelectronics, Manufacturer P/N=L7805CDT-TR, Operation Temperature="0°C ~ 150°C", Package/Case=TO-220, Power (V/A)="5V 1.5A", Supplier Part Number 1=497-7255-2-ND, ComponentDescription="Linear Voltage Regulator L7805CV   (TO-220)", ComponentLink1Description=Datasheet, Library Path 1="Power converters.SchLib", Name Component="Linear Voltage Regulator", Part Number=L7805CV, Supplier 1=Digi-key
VD2: "Zener Diode 30V, 500mW, ±5%, SOD-123", Manufacturer=Onsemi, Package=SOD-123, Supplier Part Number 1=863-MMSZ4713T1G, Temperature range="-55°C ~ 150°C", Voltage=30V, Ajax_1C_ID=49763, Ajax_1C_PN="MMSZ4713T1G SOD123 30V Zener Diode OnSemi", Ajax_1С_Status="RND Only", Component Status=Released, Component Type=SMD, ComponentLink1Description=Datasheet, ComponentLink1URL=https://eu.mouser.com/datasheet/2/308/MMSZ4678T1_D-1389385.pdf, GUID_1C=9c895df6-3100-11ed-a363-005056994834, Marking=ED, Part Number=MMSZ4713T1G, Part Type=Zener, Price=0.031, Replacement=NONE, Standard Lead Time="52 Weeks", Supplier 1=Mouser
VD3A VD3B VD3C VD3D VD3E VD4A VD4B VD4C VD4D VD4E: library part BAT54WS-7-F, "Diode Schottky 30V 100mA, Fast Recovery 5ns, Low Leakage 2uA, SOD-323", Current=100mA, Manufacturer="Diodes Incorporated", Package=SOD-323, Supplier Part Number 1=621-BAT54WS-F, Temperature range="-65°C ~ 150°C", Voltage=30V, Ajax_1C_ID=121513, Ajax_1C_PN="BAT54WS-7-F діод", Ajax_1С_Status="Mass Production", Component Status=Released, Component Type=SMD, ComponentLink1Description=Datasheet, ComponentLink1URL=https://eu.mouser.com/datasheet/2/115/DIOD_S_A0004140728_1-2542383.pdf, GUID_1C=e8a592fc-b25b-11ef-b620-0050569991a1, Marking=L9, Part Number=BAT54WS-7-F, Part Type=Schottky, Price=0.07452906, Replacement=NONE, Standard Lead Time="8 Weeks", Supplier 1=Mouser, Vf="500mV @ 30mA"
VD5: "DIODE GEN PURP 75V 250MA SOD323", Manufacturer="Diodes Incorporated", Operation Temperature="-55°C ~ 150°C", Package/Case=SOD-80, Power Rating="75V 250mA", ComponentLink1Description=Datasheet, Library Path 1=Diodes.SchLib, Manufacturer P/N=1N4148, Name Component=Diode, Part Number=1N4148, Supplier 1=Digi-key, Supplier Part Number 1=1N4148
VT1 VT8: "MOSFET N-CH 20V 6.3A SOT-23", Manufacturer=InfineonTechnologies, Manufacturer P/N=IRLML6244TRPBF, Operation Temperature="-55°C ~ 150°C (TJ)", Package/Case=SOT-23, Power Rating="20V 6.3A", Supplier Part Number 1=IRLML6244TRPBFTR-ND, ComponentLink1Description=Datasheet, ComponentLink1URL=https://www.infineon.com/dgdl/irlml6244pbf.pdf?fileId=5546d462533600a4015356686fed261f, Library Path 1=Transistors.SchLib, Name Component=Transistor, Part Number=IRLML6244, Supplier 1=Digi-key
VT2: library part IRLML6344TRPBF, "30V, 5A max N-Channel HEXFET MOSFET, 29mOhm @ Vgs = 4.5V", Manufacturer="Infineon Technologies", Package=SOT-23, Supplier Part Number 1=IRLML6344TRPBFTR-ND, Temperature range="-55°C ~ 150°C", Ajax_1C_ID=9416, Ajax_1C_PN="IRLML6344TRPBF  SOT23. полевой транзистор", Ajax_1С_Status="Mass Production", Component Status=Released, Component Type=SMD, ComponentLink1Description=Datasheet, ComponentLink1URL=https://www.infineon.com/dgdl/irlml6344pbf.pdf?fileId=5546d462533600a4015356689c44262c, GUID_1C=8299d48f-df0c-11e6-829c-d8cb8a9acc66, Id=5A, Part Number=IRLML6344TRPBF, Part Type=N-Channel, Price=0.175, Rds=37mOhm, Replacement=NONE, Standard Lead Time="16 Weeks", Supplier 1=Digi-Key, Vds=30V
VT3: "50V, 100mA Low Vce(sat) NPN Digital Transistor, Pre-Biased 4.7k/47k (with built-in resistors)", Manufacturer=Onsemi, Package=SC-75, Supplier Part Number 1=DTC143ZET1GOSTR-ND, Temperature range="-55°C ~ 150 °C", Ajax_1C_ID=9410, Ajax_1C_PN="DTC143ZET1G SC-75-3  биполярный NPN транзистор", Ajax_1С_Status="Mass Production", Component Status=Released, Component Type=SMD, ComponentLink1Description=Datasheet, ComponentLink1URL=http://www.onsemi.com/pub/Collateral/DTC143Z-D.PDF, GUID_1C=d76ac5d5-de69-11e6-829b-d8cb8a9acc66, Ic=100mA, Part Number=DTC143ZET1G, Part Type=NPN, Price=0,0125, Replacement=NONE, Standard Lead Time="8 Weeks", Supplier 1=Digi-Key, Vce=50V
VT4A VT4B VT4C VT4D VT4E VT5A VT5B VT5C VT5D VT5E: "MOSFET N-CH 55V 49A TO220AB", Manufacturer="Infineon Technologies", Operation Temperature="-55°C ~ 175°C (TJ)", Package/Case=TO-220, Power Rating="49A 55 В", Supplier Part Number 1=IRFZ44NPBF-ND, ComponentLink1Description=Datasheet, ComponentLink1URL=https://www.infineon.com/dgdl/irfz44npbf.pdf?fileId=5546d462533600a40153563b3a9f220d, Library Path 1=Transistors.SchLib, Manufacturer P/N=IRFZ44NPBF, Name Component=Transistor, Part Number=IRFZ44NPBF, Supplier 1=Digi-key
VT6 VT7: "60V, 120A max N-Channel Power MOSFET, 1.2mOhm @ Vgs = 10V", Manufacturer=STMicroelectronics, Package=PowerVDFN-8, Supplier Part Number 1=497-STL220N6F7TR-ND, Temperature range="-55°C ~ 175°C", Ajax_1C_ID=113144, Ajax_1C_PN="STL220N6F7 60V 120A N-Channel MOSFET POWERFLAT Transistor STMicroelectronics SMD RoHS", Ajax_1С_Status="Mass Production", Component Status=Released, Component Type=SMD, ComponentLink1Description=Datasheet, ComponentLink1URL=https://eu.mouser.com/datasheet/2/389/stl220n6f7-1851066.pdf, GUID_1C=27ae4649-73fe-11ef-b976-00505699fadc, Id=120A, Part Number=STL220N6F7, Part Type=N-Channel, Price=1.47, Rds=1.4mOhm, Replacement=NONE, Standard Lead Time="26 Weeks", Supplier 1=Digi-Key, Vds=60V
VT9A VT9B VT9C VT9D VT9E: "P-Channel 30 V 11A (Ta), 29A (Tc) 3.1W (Ta), 25W (Tc) Surface Mount 8-DFN-EP (3x3)", Manufacturer="Alpha & Omega Semiconductor Inc.", Operation Temperature="-55°C ~ 150°C (TJ)", Package/Case=DFN3x3, Power Rating="30V 15A", Supplier Part Number 1=785-1581-2-ND, ComponentLink1Description=Datasheet, ComponentLink1URL=https://imrad.com.ua/userdata/modules/productFiles/XwMaVOEl_AON7403_ao.pdf, Library Path 1=Transistors.SchLib, Manufacturer P/N=AON7403, Name Component=Transistor, Part Number=AON7403, Supplier 1=Digi-key
VT10A VT10B VT10C VT10D VT10E: library part IRLML6244TRPBF, "20V, 6.3A max N-Channel HEXFET MOSFET, 21mOhm @ Vgs = 4.5V", Manufacturer="Infineon Technologies", Package=SOT-23, Supplier Part Number 1=IRLML6244TRPBFTR-ND, Temperature range="-55°C ~ 150°C", Ajax_1C_ID=5903, Ajax_1C_PN="IRLML6244TRPBF. польовий транзистор", Ajax_1С_Status="Mass Production", Component Status=Released, Component Type=SMD, ComponentLink1Description=Datasheet, ComponentLink1URL=https://eu.mouser.com/datasheet/2/196/Infineon_IRLML6244_DataSheet_v01_01_EN-3363560.pdf, GUID_1C=6032e646-a6d2-11e4-9c1d-a45d36c4a9e5, Id=6.3A, Part Number=IRLML6244TRPBF, Part Type=N-Channel, Price=0.053, Rds=27mOhm, Replacement=NONE, Standard Lead Time="15 Weeks", Supplier 1=Digi-Key, Vds=20V
VT11A VT11B VT11C VT11D VT11E VT12A VT12B VT12C VT12D VT12E: "100V, 57A max N-Channel HEXFET Power MOSFET, 25mOhm @ Vgs = 10V", Manufacturer="Infineon Technologies", Package=TO-247-3, Supplier Part Number 1=IRFP3710PBF-ND, Temperature range="-55°C ~ 175°C", Ajax_1C_ID=182262, Ajax_1C_PN="IRFP3710PBF N-Channel 100V 57A TO-247-3 Infineon Technologies RoHS", Ajax_1С_Status="RND Only", Component Status=Review, Component Type=PTH, ComponentLink1Description=Datasheet, ComponentLink1URL=https://www.infineon.com/assets/row/public/documents/24/49/infineon-irfp3710-datasheet-en.pdf, Id=57A, Part Number=IRFP3710PBF, Part Type=N-Channel, Price=NONE, Rds=25mOhm, Replacement=NONE, Standard Lead Time="35 Weeks", Supplier 1=Digi-Key, Vds=100V
X1 X2 X3 X4: "2 Pin DC Power Socket, XT60, Female, Straight, Yellow, 30A, 500V, Gold Flash", Manufacturer=Amass, Temperature range="-20°C ~ 120°C", Ajax_1C_PN=NONE, Ajax_1С_Status="RND Only", Component Status=Review_1, Component Type=PTH, ComponentLink1Description=Datasheet, ComponentLink1URL=https://www.tme.eu/Document/172e3180ebad396a946f7e08df14c4b2/XT60E-F.pdf, Part Number=XT60E-F, Part Type="Power Socket", Price=NONE, Replacement=NONE, Supplier 1=TME, Supplier Part Number 1=XT60E-F
X5 X6 X7: library part DS1021-04SF11, "4 Pin 2.54mm Male Header, Vertical, 3mm and 6.1mm, PLS-4", Manufacturer=Connfly, Temperature range="-40°C ~ 105°C", Ajax_1C_ID=1215, Ajax_1C_PN="PLS40, планки зі штирьками", Ajax_1С_Status="Mass Production", Component Status=Released, Component Type=PTH, ComponentLink1Description=Datasheet, ComponentLink1URL=\\altiumdb.ajax.local\files\Datasheet\Connectors\DS1021.pdf, GUID_1C=10be163c-dd40-11e0-af93-6c626deda1bb, Part Number=DS1021-04SF11, Part Type="Header / Male Pin / Single Row", Price=0.00351512, Replacement=NONE
XP1: Manufacturer="KLS ELECTRONIC CO., LTD.", Operation Temperature="-55 °C to +105 °C", Power (V/A)="3А 250В", ComponentLink1Description=Datasheet, ComponentLink1URL=http://www.kosmodrom.com.ua/pdf/USB-Type-C-B-229.pdf, Library Path 1=Connectors.SchLib, Name Component=USB-Type-C, Package/Case=USB-Type-C-B-229, Part Number=USB-Type-C-B-229, Supplier 1=Kosmodrom
XP2 XP3: "CONN HEADER VERT 2POS 2.5MM", Manufacturer=JSTSalesAmericaInc., Manufacturer P/N=B2B-XH-2(LF)(SN), Operation Temperature="-25°C ~ 85°C", Package/Case=2.5mm, Power (V/A)=3A/250V, ComponentLink1Description=Datasheet, ComponentLink1URL=http://www.jst-belgium.be/downloads/series/TSSC018.00(XH).pdf, Library Path 1=Connectors.SchLib, Name Component="PCB Connector", Part Number=B2B-XH-2, Supplier 1=Digi-key
XS1: "DC POWER JACK CONNECTOR 6.3MM", Manufacturer=KLS, Operation Temperature="-25°C ~ 85°C", Power (V/A)=2A/250V, ComponentLink1Description=Datasheet, ComponentLink1URL=https://static.chipdip.ru/lib/078/DOC001078433.pdf, Library Path 1=Connectors.SchLib, Manufacturer P/N=DJK-02A, Name Component="Power socket", Package/Case=DJK-02A, Part Number=DJK-02A, Supplier 1=-, System=Connector
ZQ1: "24MHz, 18pF, ±10ppm, 100Ohm ESR, 100uW DL Crystal Quartz", Frequency=24MHz, Frequency Stability=±10ppm, Load Capacitance=18pF, Manufacturer=Aker, Temperature range="-10°C ~ 70 °C", Ajax_1C_ID=112658, Ajax_1C_PN="Crystal C3E-24.000-18-1010-R (CXAN-024000-3F18F00) 24MHz 10ppm 18pF 3.2x2.5mm SMD Aker Technology Corp", Ajax_1С_Status="Mass Production", Component Status=Released, Component Type=SMD, ComponentLink1Description=Datasheet, ComponentLink1URL=https://aker-usa.com/files/content/products/crystals/C3E-General-Specification.pdf, Frequency Tolerance=±10ppm, GUID_1C=0303893b-6f74-11ef-b61c-0050569991a1, Part Number=C3E-24.000-18-1010-R, Part Type=Crystal, Price=0.093, Replacement=NONE, Standard Lead Time=NONE

## Via types
v1: diameter 0.6, hole 0.3, Top Layer to Bottom Layer, tented both sides, 2 vias

## Nets (pads, with @x,y where several pads share a name; then routed paths per layer and width w, separated by ;. In a path a pad name is that pad's centre, name@x,y a point inside that pad or via, vN(x,y) a via of type N, cw(c..) or ccw(c..) an arc to the next point about the centre after c; other vN are vias at no path point)
3V3: C6.1 C7.2 C20A.1 C20B.1 C21A.1 C21B.1 C22.2 C27.1 C31A.2 C31B.2 C31C.2 C33A.2 C33B.2 C33C.2 D2A.1 D2A.2 D2A.6 D2B.2 D2B.6 D2C.6 DA3A.1 DA3B.1 L2.1 MOD1.1 R3.1 R4.2 U2.2 U2.4 | length 2.6
  Top Layer w0.3: DA3B.1@40.2,69.45 40.2,69.425 C21B.1@41.699,69.425 41.699,68.339 C20B.1@41.691,68.339
5V0: C4A.1 C4B.1 C4C.1 C4D.1 C4E.1 C24.1 C26.1 C28.2 D1.3 DA1A.8 DA1B.8 DA1C.8 DA1D.8 DA1E.8 HA1.1 U2.3 U3.3 | length 3.8
  Top Layer w0.3: C4A.1@25.05,21.4 C4A.1@25.08,21.37 ; C4B.1@25.05,63.4 C4B.1@25.08,63.37 ; DA1A.8@26.915,21.37 DA1A.8@26.945,21.34 ; DA1B.8@26.915,63.37 DA1B.8@26.945,63.34
  Top Layer w0.5: C4A.1@25.08,21.37 DA1A.8@26.915,21.37 ; C4B.1@25.08,63.37 DA1B.8@26.915,63.37
12V0: C5.1 C25.1 U1.3 U3.1 VD5.1 XP2.1 XP3.1
cA0: DD2.28 MOD1.5 | length 22.4
  Top Layer w0.2: DD2.28@45.967,71.86 46.867,71.86 46.867,73.546 46.603,73.81 45.217,73.81 45.1,73.927 45.1,86.6 48.71,86.6 MOD1.5@48.71,85
cAL: D2A.3 D2B.3 D2C.3 R3.2 VT3.1
cALERT: DD2.16 R10.1 | length 10.2
  Top Layer w0.2: 46.7,80.3 51.467,80.3 DD2.16@51.467,74.86
CAN_H: D1.7
CAN_L: D1.6
cLED: DD2.25 MOD1.8 | length 19.7
  Top Layer w0.2: MOD1.8@41.09,85 41.09,86.6 44.7,86.6 44.7,73.36 DD2.25@45.967,73.36
cPOW_EN: R28.1
cPWM: R6.1 R7.2
cPWM_BUZ: DD2.32 R32.1 R33.2 | length 43.2
  Top Layer w0.2: DD2.32@45.967,69.86 43.717,69.86 43.6,69.743 43.6,52.758 43.9,52.458 49.842,52.458 51.046,51.254 R33.2@51.046,37.267 R32.1@51.046,35.517
EXTI: R1.1 X1.2 X2.2 X3.2 X4.2
GND: C1.2 C2A.2 C2B.2 C2C.2 C2D.2 C2E.2 C4A.2 C4B.2 C4C.2 C4D.2 C4E.2 C5.2 C6.2 C7.1 C8.1 C9.2 C10.1 C11.1 C12.1 C13.1 C14.2 C15.1 C16A.2 C16B.2 C16C.2 C16D.2 C16E.2 C18.1 C20A.2 C20B.2 C21A.2 C21B.2 C22.1 C24.2 C25.2 C26.2 C27.2 C28.1 C29.2 C30.2 C31A.1 C31B.1 C31C.1 C32.2 C33A.1 C33B.1 C33C.1 D2A.7 D2B.1 D2B.7 D2C.1 D2C.2 D2C.7 DA1A.4 DA1B.4 DA1C.4 DA1D.4 DA1E.4 DA3A.4 DA3A.10 DA3B.4 DA3B.10 DA4.2 DD2.19 DD2.23 DD2.35 DD2.47 MOD1.2 MOD1.3 R2.2 R5.2 R7.1 R15A.1 R15B.1 R15C.1 R15D.1 R15E.1 R22A.1 R22B.1 R22C.1 R22D.1 R22E.1 R33.1 R38A.2 RK1A.2 RK1B.2 RK1C.2 RK1D.2 RK1E.2 RK1F.2 SB1.2 SB1.4 U1.2 U2.1 U3.2 VD2.AN VT1.2 VT2.2 VT3.2 VT8.2 X1.1 X2.1 X3.1 X4.1 X7.3 XP1.1 XS1.2 XS1.3 ZQ1.2 ZQ1.4
NetC1_1: C1.1 R4.1 R9.1 SB1.5 | length 43.8
  Top Layer w0.2: R4.1@55.417,51.825 57.317,51.825 57.317,10.2 SB1.5@57.012,10.2
NetC2A_1: C2A.1 DA1A.5 R13A.2 R15A.2 | length 4.9
  Top Layer w0.3: DA1A.5@30.755,21.34 30.786,21.371 R13A.2@35.655,21.371
NetC2B_1: C2B.1 DA1B.5 R13B.2 R15B.2 | length 4.9
  Top Layer w0.3: DA1B.5@30.755,63.34 30.786,63.371 R13B.2@35.655,63.371
NetC2C_1: C2C.1 DA1C.5 R13C.2 R15C.2
NetC2D_1: C2D.1 DA1D.5 R13D.2 R15D.2
NetC2E_1: C2E.1 DA1E.5 R13E.2 R15E.2
NetC3A_1: C3A.1 DA1A.7 R14A.1 | length 3.7
  Top Layer w0.3: R14A.1@27.85,24.9 27.879,24.871 27.879,23.33 C3A.1@27.908,23.301 28.065,23.144 28.065,21.49 DA1A.7@28.215,21.34
NetC3A_2: C3A.2 DA1A.6 R16A.1 | length 3.5
  Top Layer w0.3: DA1A.6@29.485,21.34 29.467,21.357 29.467,24.848 R16A.1@29.485,24.865
NetC3B_1: C3B.1 DA1B.7 R14B.1 | length 3.7
  Top Layer w0.3: R14B.1@27.85,66.9 27.879,66.871 27.879,65.33 27.908,65.301 28.065,65.144 28.065,63.49 DA1B.7@28.215,63.34
NetC3B_2: C3B.2 DA1B.6 R16B.1 | length 3.5
  Top Layer w0.3: DA1B.6@29.485,63.34 29.467,63.357 29.467,66.848 R16B.1@29.485,66.865
NetC3C_1: C3C.1 DA1C.7 R14C.1 | length 4.2
  Top Layer w0.2: DA1C.7@52.54,94.985 54.754,94.985 C3C.1@54.754,95.233 56.453,95.233 R14C.1@56.453,95.195
NetC3C_2: C3C.2 DA1C.6 R16C.1 | length 4
  Top Layer w0.2: DA1C.6@52.54,93.715 52.54,93.66 R16C.1@56.453,93.66
NetC3D_1: C3D.1 DA1D.7 R14D.1
NetC3D_2: C3D.2 DA1D.6 R16D.1
NetC3E_1: C3E.1 DA1E.7 R14E.1
NetC3E_2: C3E.2 DA1E.6 R16E.1
NetC16A_1: C16A.1 DA1A.3 R20A.2 R22A.2 | length 7.5
  Top Layer w0.3: DA1A.3@29.485,15.86 29.485,17.036 29.602,17.153 R20A.2@35.724,17.153
NetC16B_1: C16B.1 DA1B.3 R20B.2 R22B.2 | length 7.5
  Top Layer w0.3: DA1B.3@29.485,57.86 29.485,59.036 29.602,59.153 R20B.2@35.724,59.153
NetC16C_1: C16C.1 DA1C.3 R20C.2 R22C.2
NetC16D_1: C16D.1 DA1D.3 R20D.2 R22D.2
NetC16E_1: C16E.1 DA1E.3 R20E.2 R22E.2
NetC17A_1: C17A.1 DA1A.1 R21A.1 | length 5.9
  Top Layer w0.3: R21A.1@26.825,10.6 R21A.1@26.825,10.675 27.6,11.45 27.6,13.074 26.875,13.799 C17A.1@26.85,13.799 ; C17A.1@26.945,13.799 DA1A.1@26.945,15.86
NetC17A_2: C17A.2 DA1A.2 R24A.1 | length 3.6
  Top Layer w0.3: DA1A.2@28.215,15.86 28.215,12.462 R24A.1@28.381,12.296
NetC17B_1: C17B.1 DA1B.1 R21B.1 | length 5.9
  Top Layer w0.3: R21B.1@26.835,52.59 R21B.1@26.835,52.665 27.61,53.44 27.61,55.064 26.885,55.789 C17B.1@26.86,55.789 ; C17B.1@26.955,55.789 DA1B.1@26.955,57.85
NetC17B_2: C17B.2 DA1B.2 R24B.1 | length 3.6
  Top Layer w0.3: DA1B.2@28.225,57.85 28.225,54.452 R24B.1@28.391,54.286
NetC17C_1: C17C.1 DA1C.1 R21C.1 | length 3.8
  Top Layer w0.2: R21C.1@43.275,96.3 43.275,96.255 DA1C.1@47.06,96.255
NetC17C_2: C17C.2 DA1C.2 R24C.1 | length 4.1
  Top Layer w0.2: R24C.1@43.269,94.718 43.269,94.985 DA1C.2@47.06,94.985
NetC17D_1: C17D.1 DA1D.1 R21D.1
NetC17D_2: C17D.2 DA1D.2 R24D.1
NetC17E_1: C17E.1 DA1E.1 R21E.1
NetC17E_2: C17E.2 DA1E.2 R24E.1
NetC34A_1: C34A.1 D2A.9 R38A.1
NetC34A_2: C34A.2 D2A.10 R37A.1
NetC34B_1: C34B.1 D2B.9 R38B.1
NetC34B_2: C34B.2 D2B.10 R37B.1
NetC34C_1: C34C.1 D2C.9 R38C.1
NetC34C_2: C34C.2 D2C.10 R37C.1
NetD1_5: D1.5
NetD2A_8: D2A.8
NetD2B_8: D2B.8
NetD2C_8: D2C.8 R1.2 R2.1 VD2.CA
NetDA4_1: DA4.1 R28.2
NetDA4_3: DA4.3 R29.2 VT6.S VT7.S
NetDA4_4: DA4.4 R29.1 VT6.G VT7.G
NetDD2_18: DD2.18
NetDD2_22: DD2.22
NetDD2_40: DD2.40
NetDD2_43: DD2.43
NetDD2_45: DD2.45 R5.1 | length 1.7
  Top Layer w0.2: DD2.45@51.467,66.36 51.486,66.341 51.486,65.514 51.7,65.3 R5.1@51.7,64.785
NetDD2_46: DD2.46
NetHA1_2: HA1.2 VT8.3 | length 3.5
  Top Layer w0.5: VT8.3@50.1,29.9 50.125,29.9 HA1.2@50.125,26.425
NetR6_2: R6.2 VT1.1
NetR8_1: 
NetR8_2: 
NetR10_2: R10.2 R11.2 VT2.1 VT3.3 | length 3.9
  Top Layer w0.2: VT2.1@37,78.35 37.025,78.325 38.375,78.325 R11.2@38.4,78.3 ; R10.2@38.4,77.4 R11.2@38.4,78.3 ; VT3.3@38.45,79.9 38.425,79.875 38.425,78.325 R11.2@38.4,78.3
NetR12A_1: R12A.1 VD3A.AN | length 1.4
  Top Layer w0.3: R12A.1@32.475,25.7 VD3A.AN@33.875,25.7
NetR12A_2: R12A.2 R14A.2 VT4A.1 VT11A.1 | length 9.8
  Top Layer w0.3: VT4A.1@21.45,26.46 21.46,26.45 R14A.2@27.85,26.45 27.925,26.45 28.7,25.675 30.9,25.675 R12A.2@30.925,25.7
NetR12B_1: R12B.1 VD3B.AN | length 1.9
  Top Layer w0.2: VD3B.AN@32.475,69.6 32.475,67.69 R12B.1@32.485,67.69
NetR12B_2: R12B.2 R14B.2 VT4B.1 VT11B.1 | length 9.8
  Top Layer w0.3: VT4B.1@21.45,68.46 21.46,68.45 27.85,68.45 27.925,68.45 28.7,67.675 30.9,67.675 R12B.2@30.925,67.7
NetR12C_1: R12C.1 VD3C.AN | length 1.6
  Top Layer w0.2: VD3C.AN@57.1,89 R12C.1@57.1,90.55
NetR12C_2: R12C.2 R14C.2 VT4C.1 VT11C.1 | length 21.4
  Top Layer w0.2: R14C.2@58.003,95.195 78.7,95.195 VT4C.1@78.7,94.54
NetR12D_1: R12D.1 VD3D.AN
NetR12D_2: R12D.2 R14D.2 VT4D.1 VT11D.1 | length 9.8
  Top Layer w0.3: R12D.2@69.225,53.3 69.25,53.325 71.45,53.325 72.225,52.55 R14D.2@72.3,52.55 VT4D.1@78.69,52.55
NetR12E_1: R12E.1 VD3E.AN
NetR12E_2: R12E.2 R14E.2 VT4E.1 VT11E.1
NetR16A_2: R16A.2 R17A.2 VT4A.3 VT11A.3
NetR16B_2: R16B.2 R17B.2 VT4B.3 VT11B.3
NetR16C_2: R16C.2 R17C.2 VT4C.3 VT11C.3 | length 24.9
  Top Layer w0.2: R16C.2@58.003,93.66 75.4,93.66 75.4,89.44 VT4C.3@78.7,89.44
NetR16D_2: R16D.2 R17D.2 VT4D.3 VT11D.3
NetR16E_2: R16E.2 R17E.2 VT4E.3 VT11E.3
NetR17A_1: R17A.1 R26A.1 R37C.2 R41A.1 R47A.2 R49A.2
NetR17B_1: R17B.1 R17E.1 R26B.1 R26E.1 R37B.2 R38C.2 R41B.1 R41E.1 R47B.2 R47E.2 R49B.2 R49E.2
NetR17C_1: R17C.1 R17D.1 R26C.1 R26D.1 R37A.2 R38B.2 R41C.1 R41D.1 R47C.2 R47D.2 R49C.2 R49D.2
NetR19A_1: R19A.1 VD4A.AN | length 1.7
  Top Layer w0.3: VD4A.AN@29.846,10.872 29.871,10.846 R19A.1@29.871,9.153
NetR19A_2: R19A.2 R21A.2 VT5A.1 VT12A.1 | length 8.4
  Top Layer w0.3: VT5A.1@21.45,5.46 25.143,9.153 R19A.2@28.321,9.153
NetR19B_1: R19B.1 VD4B.AN
NetR19B_2: R19B.2 R21B.2 VT5B.1 VT12B.1
NetR19C_1: R19C.1 VD4C.AN | length 2
  Top Layer w0.2: R19C.1@41.7,91.625 43.6,91.625 VD4C.AN@43.6,91.7
NetR19C_2: R19C.2 R21C.2 VT5C.1 VT12C.1 | length 28.7
  Top Layer w0.2: VT5C.1@21.45,89.46 26.4,89.46 26.4,93.175 R19C.2@41.7,93.175 42.5,93.175 42.5,96.3 R21C.2@41.725,96.3
NetR19D_1: R19D.1 VD4D.AN
NetR19D_2: R19D.2 R21D.2 VT5D.1 VT12D.1 | length 8.4
  Top Layer w0.3: R19D.2@71.829,69.847 73.325,69.847 75.007,69.847 VT5D.1@78.7,73.54
NetR19E_1: R19E.1 VD4E.AN
NetR19E_2: R19E.2 R21E.2 VT5E.1 VT12E.1
NetR24A_2: R24A.2 R26A.2 VT5A.3 VT12A.3 | length 6.1
  Top Layer w0.3: VT5A.3@21.45,10.56 23.09,12.2 R24A.2@26.825,12.2
NetR24B_2: R24B.2 R26B.2 VT5B.3 VT12B.3
NetR24C_2: R24C.2 R26C.2 VT5C.3 VT12C.3 | length 20.4
  Top Layer w0.2: VT5C.3@21.45,94.56 21.45,94.718 R24C.2@41.719,94.718
NetR24D_2: R24D.2 R26D.2 VT5D.3 VT12D.3
NetR24E_2: R24E.2 R26E.2 VT5E.3 VT12E.3
NetR31_1: R31.1 XP1.5
NetR31_2: R31.2
NetR32_2: R32.2 VT8.1 | length 1.9
  Top Layer w0.2: R32.2@51.046,33.967 51.046,32.1 VT8.1@51.05,32.1
NetR39A_2: R39A.2 R40A.1
NetR39B_2: R39B.2 R40B.1
NetR39C_2: R39C.2 R40C.1
NetR39D_2: R39D.2 R40D.1
NetR39E_2: R39E.2 R40E.1
NetR40A_2: R40A.2 R42A.1 VT9A.1 VT9A.2 VT9A.3
NetR40B_2: R40B.2 R42B.1 VT9B.1 VT9B.2 VT9B.3
NetR40C_2: R40C.2 R42C.1 VT9C.1 VT9C.2 VT9C.3
NetR40D_2: R40D.2 R42D.1 VT9D.1 VT9D.2 VT9D.3
NetR40E_2: R40E.2 R42E.1 VT9E.1 VT9E.2 VT9E.3
NetR41A_2: R41A.2 VT9A.5 VT9A.6 VT9A.7 VT9A.8
NetR41B_2: R41B.2 VT9B.5 VT9B.6 VT9B.7 VT9B.8
NetR41C_2: R41C.2 VT9C.5 VT9C.6 VT9C.7 VT9C.8
NetR41D_2: R41D.2 VT9D.5 VT9D.6 VT9D.7 VT9D.8
NetR41E_2: R41E.2 VT9E.5 VT9E.6 VT9E.7 VT9E.8
NetR42A_2: R42A.2 R44A.2 VT10A.3
NetR42B_2: R42B.2 R44B.2 VT10B.3
NetR42C_2: R42C.2 R44C.2 VT10C.3
NetR42D_2: R42D.2 R44D.2 VT10D.3
NetR42E_2: R42E.2 R44E.2 VT10E.3
NetR43_1: R43.1 SB1.1 | length 42.7
  Top Layer w0.2: SB1.1@42.562,10.2 42.662,10.2 44.953,12.491 44.953,51.4 44.628,51.725 R43.1@44.6,51.725
NetR44A_1: R44A.1 VT9A.4
NetR44B_1: R44B.1 VT9B.4
NetR44C_1: R44C.1 VT9C.4
NetR44D_1: R44D.1 VT9D.4
NetR44E_1: R44E.1 VT9E.4
NetR45_1: R45.1 SB1.3 | length 48.1
  Top Layer w0.2: SB1.3@42.562,5.2 42.712,5.2 46.2,8.688 R45.1@46.2,51.725
NetR46A_1: R46A.1 R47A.1
NetR46A_2: R46A.2 R48A.1 VT10A.1
NetR46B_1: R46B.1 R47B.1
NetR46B_2: R46B.2 R48B.1 VT10B.1
NetR46C_1: R46C.1 R47C.1
NetR46C_2: R46C.2 R48C.1 VT10C.1
NetR46D_1: R46D.1 R47D.1
NetR46D_2: R46D.2 R48D.1 VT10D.1
NetR46E_1: R46E.1 R47E.1
NetR46E_2: R46E.2 R48E.1 VT10E.1
NetR48A_2: R48A.2 R49A.1 VT10A.2
NetR48B_2: R48B.2 R49B.1 VT10B.2
NetR48C_2: R48C.2 R49C.1 VT10C.2
NetR48D_2: R48D.2 R49D.1 VT10D.2
NetR48E_2: R48E.2 R49E.1 VT10E.2
NetVD3A_CA: VD3A.CA VD3B.CA VD3C.CA VD3D.CA VD3E.CA VD4A.CA VD4B.CA VD4C.CA VD4D.CA VD4E.CA VT2.3 | length 227.7
  Top Layer w0.2: 31.1,80.4 31.1,89.9 47.988,89.9 48.013,89.875 52.387,89.875 52.412,89.9 56,89.9 56,86.75 VD3C.CA@57.1,86.75 62,86.75 62,81.1 63.7,81.1 63.7,68.128 ; VD3E.CA@63.825,11.3 63.6,11.3 63.6,15.041 63.601,15.042 63.601,16.216 63.6,16.217 63.6,19.259 63.601,19.26 63.601,26.128 VD4E.CA@68.054,26.128 68.054,37 63.825,37 VD3D.CA@63.825,53.3 63.7,53.3 63.7,68.128 ; VD4D.CA@68.054,68.128 63.7,68.128
  Top Layer w0.3: 31.1,80.4 34.725,80.4 VD3B.CA@34.725,69.6 34.725,64.9 36.499,64.9 36.499,52.862 ; VD4A.CA@32.096,10.872 35.772,10.872 36.48,11.58 36.48,25.575 36.355,25.7 VD3A.CA@36.325,25.7 36.325,30.7 31.3,30.7 31.3,37.7 36.499,37.7 36.499,52.862 ; VD4B.CA@32.106,52.862 36.499,52.862
NetVD5_2: VD5.2 VT1.3 XP2.2 XP3.2
NetVD8_2: VT6.D
NRST: C18.2 DD2.7 R30.2 | length 1.7
  Top Layer w0.25: DD2.7@54.467,70.86 55.86,70.86 C18.2@56.1,71.1
PF0: C29.1 DD2.5 ZQ1.3 | length 6.8
  Top Layer w0.2: DD2.5@54.467,69.86 56.718,69.86 C29.1@57.273,69.305 59.645,69.305 60.55,68.4 ZQ1.3@60.55,68.3
PF1: C30.1 DD2.6 ZQ1.1 | length 4.3
  Top Layer w0.2: DD2.6@54.467,70.36 58.723,70.36 ZQ1.1@58.723,70.365
POWER: R39A.1 R39B.1 R39C.1 R39D.1 R39E.1 VT4A.2 VT4B.2 VT4C.2 VT4D.2 VT4E.2 VT5A.2 VT5B.2 VT5C.2 VT5D.2 VT5E.2 VT7.D VT11A.2 VT11B.2 VT11C.2 VT11D.2 VT11E.2 VT12A.2 VT12B.2 VT12C.2 VT12D.2 VT12E.2
SCL: D2A.5 D2B.5 D2C.5 DD2.27 MOD1.7 | length 15
  Top Layer w0.2: MOD1.7@43.63,85 43.63,72.36 DD2.27@45.967,72.36
SCL1: DA3B.2 DD2.31 | length 8.9
  Top Layer w0.3: DA3B.2@39.7,69.45 39.7,71.3 41.9,71.3 41.9,70.591 42.131,70.36 DD2.31@45.967,70.36
SCL2: DA3A.2 DD2.39 | length 12
  Top Layer w0.3: DD2.39@48.467,66.36 48.467,61.76 DA3A.2@55.888,61.76
SDA: D2A.4 D2B.4 D2C.4 DD2.29 MOD1.6 | length 15.4
  Top Layer w0.2: DD2.29@45.967,71.36 47.267,71.36 47.267,73.974 46.17,75.07 MOD1.6@46.17,85
SDA1: DA3B.3 DD2.30 | length 10.3
  Top Layer w0.3: DA3B.3@39.2,69.45 39.2,71.9 42.5,71.9 42.5,70.86 DD2.30@45.967,70.86
SDA2: DA3A.3 DD2.44 | length 10.3
  Top Layer w0.3: v1(50.965,61.11) 51.003,61.071 52.171,61.071 52.36,61.26 DA3A.3@55.888,61.26 ; v1(50.967,62.41) DD2.44@50.967,66.36
  Bottom Layer w0.3: v1(50.965,61.11) 50.966,61.111 v1(50.967,62.41) v1(50.967,62.41)
SWCLK: DD2.38 X7.1
SWDIO: DD2.37 X7.4
UDB_DP: DD2.34
USB_DM: DD2.33
V_MCU: C8.2 C9.1 C10.2 C11.2 C12.2 C13.2 C14.1 C15.2 DD2.1 DD2.20 DD2.21 DD2.24 DD2.36 DD2.48 L2.2 R30.1 X7.2 | length 13.3
  Top Layer w0.2: DD2.24@47.467,74.86 47.457,74.86 C12.2@47.457,76.43 C8.2@48.967,76.43 ; DD2.21@48.972,74.865 48.972,76.202 C8.2@49.2,76.43 49.461,76.169 DD2.20@49.461,74.866 ; DD2.48@52.967,66.36 52.967,64.8 C11.2@53,64.8 54.86,64.8 C10.2@54.86,66.8 54.86,67.86 DD2.1@54.467,67.86
VBUS: XP1.2
VCC_in: C32.1 U1.1 XS1.1
VREF1: DA3B.8 R13A.1 | length 44.4
  Top Layer w0.3: R13A.1@37.274,21.371 38.149,21.371 38.39,21.612 38.39,59.632 38.876,60.118 40.1,60.118 40.1,63.35
VREF2: DA3B.9 R20A.1 | length 49.3
  Top Layer w0.3: R20A.1@37.274,17.153 38.724,17.153 38.9,17.329 38.9,59.435 39.083,59.618 40.6,59.618 40.6,63.35
VREF3: DA3B.6 R13B.1 | length 1.9
  Top Layer w0.3: R13B.1@37.274,63.271 37.274,63.35 39.1,63.35
VREF4: DA3B.7 R20B.1 | length 6.6
  Top Layer w0.3: R20B.1@37.274,59.053 37.274,60.618 39.6,60.618 39.6,63.35
VREF5: DA3A.6 R13E.1 | length 46.5
  Top Layer w0.2: DA3A.6@60.868,60.225 60.868,15.746 60.985,15.629 R13E.1@62.876,15.629
VREF6: DA3A.7 R20E.1 | length 42.8
  Top Layer w0.2: DA3A.7@60.388,60.76 61.183,60.76 61.3,60.642 61.3,20.677 62.13,19.847 R20E.1@62.876,19.847
VREF7: DA3A.8 R13D.1 | length 5.7